# Altium PCB Grabber_DIOT.PCBDOC (part 7 of 7)
Units mm, origin at the board's own origin, x right, y up, seen from the top; angles counter-clockwise.
Board outline 221.14 x 100 mm, 4 copper layers (TopLayer, MidLayer1, Internal layer GND, Bottom Layer), stack 1.607 mm thick; 234 components, 170 nets, 1025 pads, 389 vias.
Unrouted connection lines stored in the file: 2.
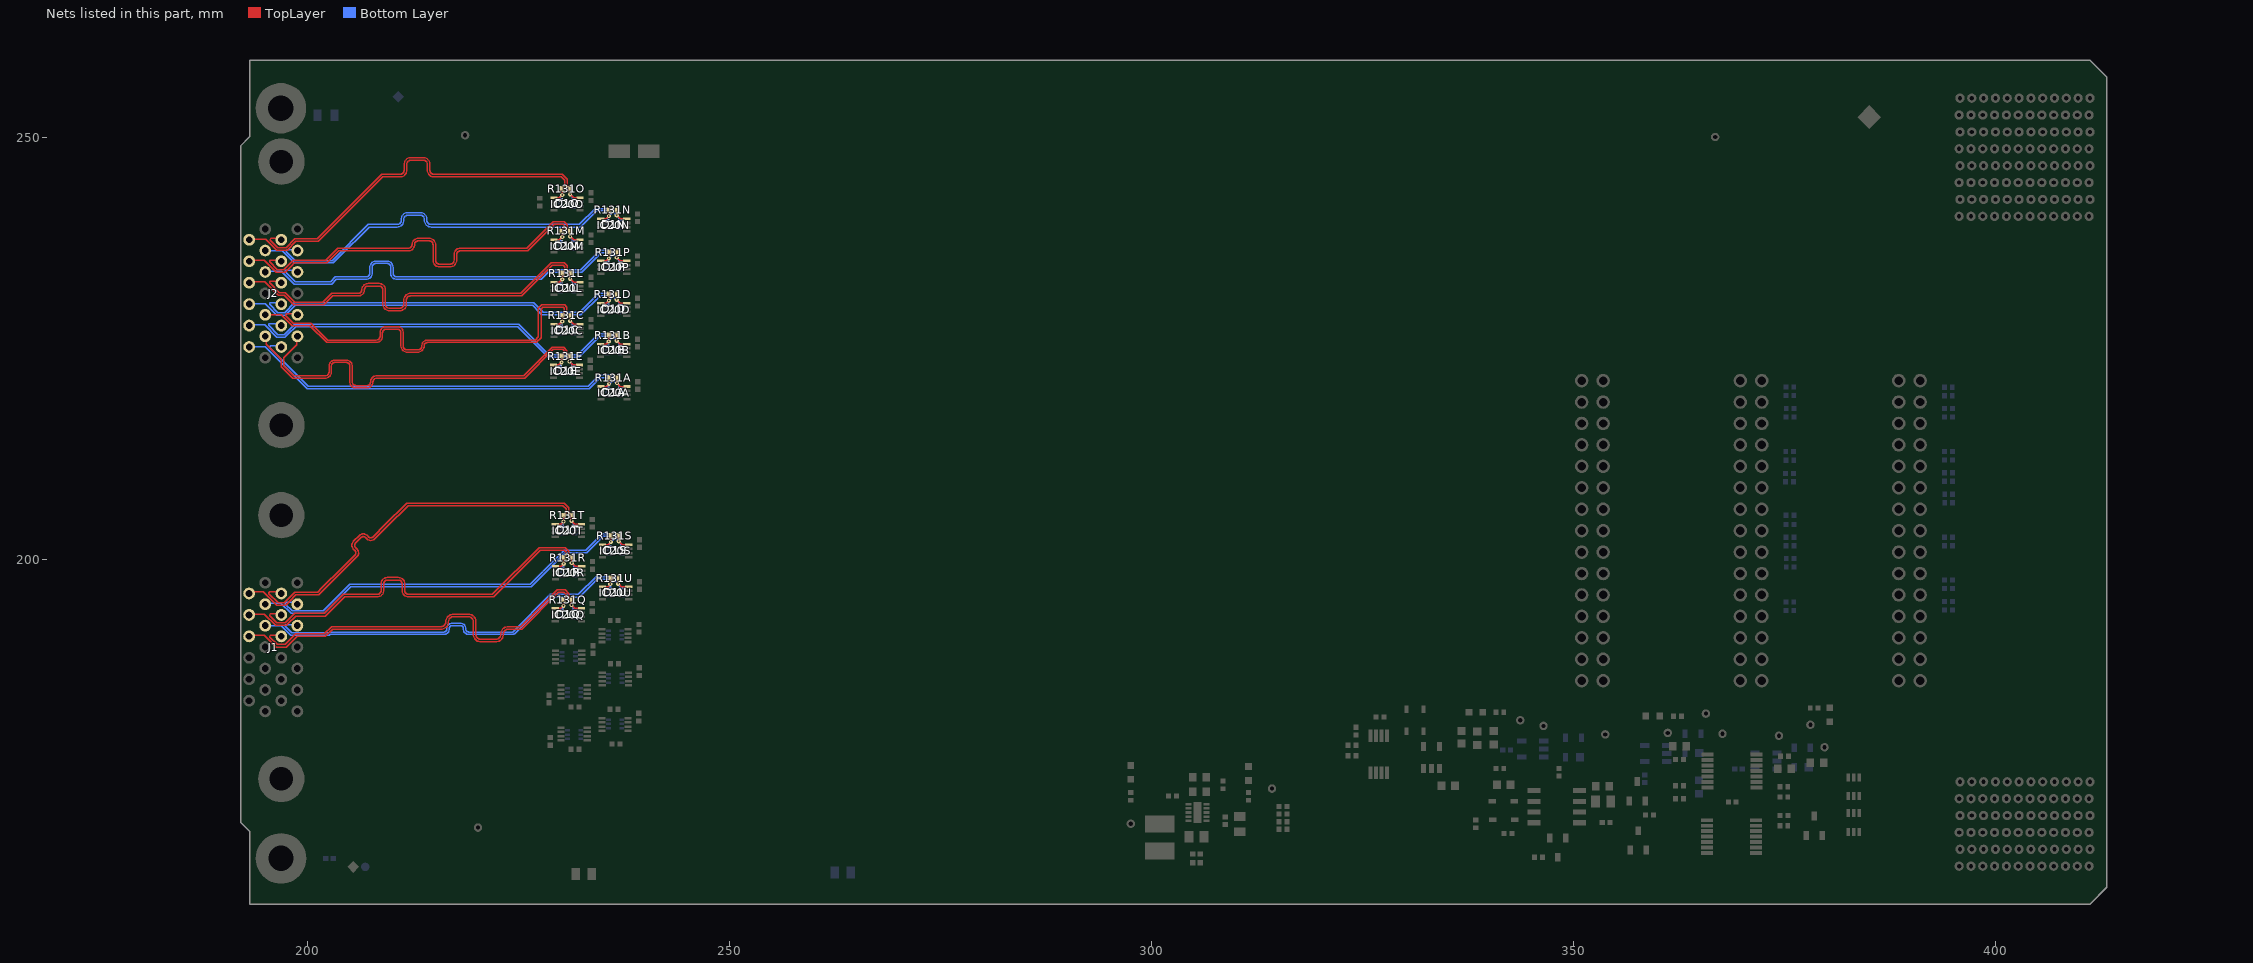
[diagram p8: the nets of this part, all layers, seen from the top]

## Via types
v1: diameter 0.5, hole 0.2, TopLayer to Bottom Layer, tented both sides, 374 vias
v2: diameter 0.8, hole 0.5, TopLayer to Bottom Layer, tented both sides, 15 vias

## Nets (pads, with @x,y where several pads share a name; then routed paths per layer and width w, separated by ;. In a path a pad name is that pad's centre, name@x,y a point inside that pad or via, vN(x,y) a via of type N, cw(c..) or ccw(c..) an arc to the next point about the centre after c; other vN are vias at no path point) (continued)
X0_N: D1T.3 IC20T.1 J1.25 R131T.1 | length 48.3
  TopLayer w0.152: J1.25@193.111,195.969 193.31,196.168 194.789,196.168 195.375,195.582 195.382,195.582 195.899,195.065 195.899,195.058 196.393,194.564 197.424,194.564 197.914,195.054 198.649,195.788 201.339,195.788 201.72,196.169 201.724,196.169 204.548,198.992 205.891,200.336 ccw(c205.438,200.788) 205.936,201.191 205.936,201.196 205.892,201.24 205.694,201.438 cw(c205.931,201.675) 205.694,201.912 206.405,202.623 cw(c206.642,202.386) 206.88,202.623 207.076,202.426 ccw(c207.529,202.879) 207.982,202.426 209.544,203.989 211.887,206.332 211.887,206.35 230.302,206.35 230.669,205.983 230.669,205.539 230.366,205.236 v1(230.366,204.491) 230.041,204.166 IC20T.1@229.391,204.166
  Bottom Layer w0.152: D1T.3@230.151,203.991 230.151,204.276 v1(230.366,204.491)
X0_P: D1T.4 IC20T.8 J1.12 R131T.2 | length 48.2
  TopLayer w0.152: J1.12@196.921,196.106 196.86,196.168 195.554,196.168 195.465,196.079 195.465,195.952 196.555,194.862 197.3,194.862 198.525,196.087 201.216,196.087 201.509,196.38 201.509,196.384 204.332,199.208 205.675,200.551 ccw(c205.438,200.788) 205.675,201.026 205.479,201.222 cw(c205.931,201.675) 205.479,202.127 206.19,202.839 cw(c206.642,202.386) 207.095,202.839 207.292,202.642 ccw(c207.529,202.879) 207.766,202.642 209.329,204.204 211.582,206.458 211.582,206.476 211.761,206.654 230.428,206.654 230.974,206.109 230.974,205.568 231.306,205.236 v1(231.306,204.57) 231.71,204.166 IC20T.8@232.491,204.166
  Bottom Layer w0.152: v1(231.306,204.57) 231.541,204.335 231.541,204.181 D1T.4@231.731,203.991
X1_N: D1S.3 IC20S.1 J1.24 R131S.1 | length 48.7
  TopLayer w0.152: IC20S.1@235.001,201.758 235.651,201.758 v1(235.976,202.083) R131S.1@235.976,202.808
  Bottom Layer w0.152: J1.24@195.016,194.699 195.115,194.798 196.881,194.798 198.076,193.603 202.008,193.603 205.146,196.741 226.527,196.741 226.705,196.919 227.612,197.826 228.127,198.341 230.589,200.803 233.108,200.803 235.071,202.766 236.105,202.766 236.294,202.577 236.294,202.4 v1(235.976,202.083) 235.761,201.868 D1S.3@235.761,201.583
X1_P: D1S.4 IC20S.8 J1.11 R131S.2 | length 48.5
  TopLayer w0.152: R131S.2@236.916,202.808 v1(236.916,202.162) 237.32,201.758 IC20S.8@238.101,201.758
  Bottom Layer w0.152: J1.11@198.826,194.836 198.748,194.914 197.495,194.914 197.406,194.825 197.406,194.699 198.197,193.908 201.882,193.908 205.02,197.046 226.401,197.046 227.485,198.13 227.911,198.556 ; 227.94,198.585 230.463,201.108 232.982,201.108 234.945,203.071 236.231,203.071 236.598,202.703 236.598,202.395 236.831,202.162 v1(236.916,202.162) 237.151,201.927 237.151,201.773 D1S.4@237.341,201.583
X2_N: D1R.3 IC20R.1 J1.23 R131R.1 | length 48.1
  TopLayer w0.152: J1.23@193.111,193.429 193.2,193.518 194.926,193.518 196.248,192.196 197.517,192.196 197.695,192.374 198.619,193.298 202.135,193.298 204.414,195.578 204.574,195.578 208.318,195.578 ccw(c208.318,196.319) 209.059,196.319 209.059,197.125 cw(c209.496,197.125) 209.496,197.562 210.807,197.562 cw(c210.807,197.125) 211.244,197.125 211.244,196.319 ccw(c211.985,196.319) 211.985,195.578 214.703,195.578 222.069,195.578 227.599,201.108 230.461,201.108 230.695,200.873 230.695,200.539 230.401,200.245 v1(230.401,199.5) 230.076,199.175 IC20R.1@229.426,199.175
  Bottom Layer w0.152: D1R.3@230.186,199 230.186,199.285 v1(230.401,199.5)
X2_P: D1R.4 IC20R.8 J1.10 R131R.2 | length 47.9
  TopLayer w0.152: J1.10@196.921,193.566 196.905,193.55 195.629,193.55 195.54,193.461 195.54,193.335 196.374,192.501 197.39,192.501 198.493,193.603 202.008,193.603 204.288,195.882 204.574,195.882 208.318,195.882 ccw(c208.318,196.319) 208.755,196.319 208.755,197.125 cw(c209.496,197.125) 209.496,197.866 210.807,197.866 cw(c210.807,197.125) 211.549,197.125 211.549,196.319 ccw(c211.985,196.319) 211.985,195.882 214.703,195.882 221.943,195.882 227.473,201.412 230.587,201.412 231,200.999 231,200.565 231.107,200.458 231.127,200.458 231.341,200.245 v1(231.341,199.579) 231.745,199.175 IC20R.8@232.526,199.175
  Bottom Layer w0.152: v1(231.341,199.579) 231.576,199.344 231.576,199.19 D1R.4@231.766,199
X3_N: D1Q.3 IC20Q.1 J1.21 R131Q.1 | length 48.2
  TopLayer w0.152: J1.21@193.111,190.889 193.239,191.017 194.916,191.017 196.313,189.621 197.527,189.621 198.791,190.885 202.154,190.885 203,191.731 214.636,191.731 215.838,191.731 ccw(c215.838,192.625) 216.732,192.625 cw(c217.321,192.625) 217.321,193.214 219.089,193.214 cw(c219.089,192.625) 219.679,192.625 219.679,191.131 ccw(c220.573,191.131) 220.573,190.237 222.34,190.237 ccw(c222.34,191.131) 223.235,191.131 223.235,191.142 cw(c223.824,191.142) 223.824,191.731 224.052,191.731 225.395,191.731 229.759,196.095 230.42,196.095 230.667,195.848 230.667,195.562 230.366,195.262 v1(230.366,194.517) 230.041,194.192 IC20Q.1@229.391,194.192
  Bottom Layer w0.152: D1Q.3@230.151,194.017 230.151,194.302 v1(230.366,194.517)
X3_P: D1Q.4 IC20Q.8 J1.8 R131Q.2 | length 47.9
  TopLayer w0.152: J1.8@196.921,190.889 196.793,191.017 195.872,191.017 195.631,191.017 195.542,190.928 195.542,190.802 196.418,189.926 197.401,189.926 198.665,191.19 202.028,191.19 202.874,192.036 214.636,192.036 215.838,192.036 ccw(c215.838,192.625) 216.427,192.625 cw(c217.321,192.625) 217.321,193.519 219.089,193.519 cw(c219.089,192.625) 219.983,192.625 219.983,191.131 ccw(c220.573,191.131) 220.573,190.542 222.34,190.542 ccw(c222.34,191.131) 222.93,191.131 222.93,191.142 cw(c223.824,191.142) 223.824,192.036 224.052,192.036 225.269,192.036 229.633,196.399 230.546,196.399 231.005,195.94 231.005,195.562 231.306,195.262 v1(231.306,194.596) 231.71,194.192 IC20Q.8@232.491,194.192
  Bottom Layer w0.152: v1(231.306,194.596) 231.541,194.361 231.541,194.207 D1Q.4@231.731,194.017
XCLK_N: D1U.3 IC20U.1 J1.22 R131U.1 | length 48.6
  TopLayer w0.152: IC20U.1@235.001,196.792 235.636,196.792 235.885,197.041 235.885,197.751 R131U.1@235.937,197.803
  Bottom Layer w0.152: J1.22@195.018,192.157 196.901,192.157 198.045,191.013 202.612,191.013 202.721,191.123 215.992,191.123 216.208,191.123 ccw(c216.208,191.738) 216.822,191.738 216.822,191.821 cw(c217.158,191.821) 217.158,192.156 218.164,192.156 cw(c218.164,191.821) 218.499,191.821 218.499,191.738 ccw(c219.114,191.738) 219.114,191.123 220.253,191.123 224.477,191.123 224.542,191.189 224.578,191.189 228.934,195.545 232.25,195.545 232.429,195.723 234.358,197.652 236.171,197.652 236.261,197.563 236.261,197.437 235.918,197.094 v1(235.894,197.094) ; D1U.3@235.863,196.617 235.885,196.639 v1@235.885,197.071
XCLK_P: D1U.4 IC20U.8 J1.9 R131U.2 | length 49
  TopLayer w0.152: R131U.2@236.877,197.803 236.825,197.751 236.825,197.101 236.883,197.101 237.192,196.792 IC20U.8@238.101,196.792
  Bottom Layer w0.152: J1.9@198.826,192.159 198.703,192.282 197.477,192.282 197.387,192.193 197.387,192.067 198.161,191.293 199.273,191.293 202.496,191.293 202.606,191.402 215.992,191.402 216.208,191.402 ccw(c216.208,191.738) 216.543,191.738 216.543,191.821 cw(c217.158,191.821) 217.158,192.436 218.164,192.436 cw(c218.164,191.821) 218.778,191.821 218.778,191.738 ccw(c219.114,191.738) 219.114,191.402 220.253,191.402 224.361,191.402 228.808,195.85 232.124,195.85 234.231,197.957 236.298,197.957 236.551,197.703 236.551,197.39 v1(236.834,197.107) ; v1@236.768,197.159 236.892,197.035 236.892,196.931 237.206,196.617 D1U.4@237.341,196.617
Y0_N: D1O.3 IC20O.1 J2.25 R131O.1 | length 48.1
  TopLayer w0.152: J2.25@193.117,237.874 193.188,237.946 195.074,237.946 195.113,237.907 196.384,236.635 197.614,236.635 198.657,237.678 201.321,237.678 208.973,245.33 210.769,245.33 210.998,245.33 ccw(c210.998,246.123) 211.79,246.123 211.79,246.815 cw(c212.278,246.815) 212.278,247.303 213.741,247.303 cw(c213.741,246.815) 214.229,246.815 214.229,246.123 ccw(c215.021,246.123) 215.021,245.33 219.676,245.33 219.688,245.343 221.224,245.343 230.086,245.343 230.499,244.93 230.499,244.23 230.206,243.937 R131O.1@230.206,243.917 v1(230.206,243.192) 229.881,242.867 IC20O.1@229.231,242.867
  Bottom Layer w0.152: D1O.3@229.991,242.692 229.991,242.977 v1(230.206,243.192)
Y0_P: D1O.4 IC20O.8 J2.12 R131O.2 | length 47.9
  TopLayer w0.152: J2.12@196.927,237.874 196.742,238.059 195.696,238.059 195.607,237.97 195.607,237.844 196.51,236.94 197.488,236.94 198.53,237.983 201.194,237.983 208.847,245.635 210.769,245.635 210.998,245.635 ccw(c210.998,246.123) 211.485,246.123 211.485,246.815 cw(c212.278,246.815) 212.278,247.607 213.741,247.607 cw(c213.741,246.815) 214.533,246.815 214.533,246.123 ccw(c215.021,246.123) 215.021,245.635 219.549,245.635 219.562,245.648 221.224,245.648 230.212,245.648 230.804,245.056 230.804,244.279 231.146,243.937 R131O.2@231.146,243.917 v1(231.146,243.271) 231.55,242.867 IC20O.8@232.331,242.867
  Bottom Layer w0.152: v1(231.146,243.271) 231.381,243.036 231.381,242.882 D1O.4@231.571,242.692
Y1_N: D1N.3 IC20N.1 J2.24 R131N.1 | length 49
  TopLayer w0.152: IC20N.1@234.766,240.367 235.416,240.367 v1(235.741,240.692) R131N.1@235.741,241.417
  Bottom Layer w0.152: J2.24@195.022,236.604 197.002,236.604 197.036,236.57 198.476,235.13 203.073,235.13 203.545,235.603 203.581,235.603 203.76,235.782 207.365,239.387 210.416,239.387 210.644,239.387 ccw(c210.644,240.179) 211.437,240.179 211.437,240.301 cw(c211.924,240.301) 211.924,240.788 213.387,240.788 cw(c213.387,240.301) 213.875,240.301 213.875,240.179 ccw(c214.668,240.179) 214.668,239.387 216.756,239.387 232.369,239.387 234.272,241.29 235.952,241.29 236.041,241.2 236.041,240.992 v1(235.741,240.692) 235.526,240.477 D1N.3@235.526,240.192
Y1_P: D1N.4 IC20N.8 J2.11 R131N.2 | length 48.7
  TopLayer w0.152: R131N.2@236.681,241.417 v1(236.681,240.771) 237.085,240.367 IC20N.8@237.866,240.367
  Bottom Layer w0.152: J2.11@198.832,236.604 198.732,236.705 197.602,236.705 197.512,236.615 197.512,236.489 198.592,235.41 202.957,235.41 207.239,239.692 210.416,239.692 210.644,239.692 ccw(c210.644,240.179) 211.132,240.179 211.132,240.301 cw(c211.924,240.301) 211.924,241.093 213.387,241.093 cw(c213.387,240.301) 214.18,240.301 214.18,240.179 ccw(c214.668,240.179) 214.668,239.692 216.756,239.692 232.243,239.692 234.129,241.578 236.109,241.578 236.363,241.324 236.363,241.004 236.596,240.771 v1(236.681,240.771) 236.916,240.536 236.916,240.382 D1N.4@237.106,240.192
Y2_N: D1M.3 IC20M.1 J2.23 R131M.1 | length 48.2
  TopLayer w0.152: J2.23@193.117,235.334 193.248,235.465 194.891,235.465 196.326,234.03 197.367,234.03 198.16,234.824 198.16,234.829 198.47,235.139 202.31,235.139 203.736,236.566 211.049,236.566 211.976,236.566 ccw(c211.976,237.307) 212.717,237.307 cw(c213.154,237.307) 213.154,237.744 214.465,237.744 cw(c214.465,237.307) 214.902,237.307 214.902,235.429 ccw(c215.643,235.429) 215.643,234.687 216.954,234.687 ccw(c216.954,235.429) 217.696,235.429 217.696,236.129 cw(c218.133,236.129) 218.133,236.566 218.361,236.566 226.132,236.566 229.283,239.717 230.305,239.717 230.394,239.627 230.533,239.488 230.533,239.251 230.44,239.157 230.42,239.157 230.206,238.944 R131M.1@230.206,238.924 v1(230.206,238.199) 229.881,237.874 IC20M.1@229.231,237.874
  Bottom Layer w0.152: D1M.3@229.991,237.699 229.991,237.984 v1(230.206,238.199)
Y2_P: D1M.4 IC20M.8 J2.10 R131M.2 | length 48.1
  TopLayer w0.152: J2.10@196.927,235.599 196.757,235.769 196.458,235.471 195.621,235.471 195.532,235.381 195.532,235.255 196.452,234.335 197.24,234.335 197.855,234.95 197.855,234.956 198.344,235.444 202.184,235.444 203.61,236.87 211.049,236.87 211.976,236.87 ccw(c211.976,237.307) 212.413,237.307 cw(c213.154,237.307) 213.154,238.049 214.465,238.049 cw(c214.465,237.307) 215.207,237.307 215.207,235.429 ccw(c215.643,235.429) 215.643,234.992 216.954,234.992 ccw(c216.954,235.429) 217.391,235.429 217.391,236.129 cw(c218.133,236.129) 218.133,236.87 218.361,236.87 226.006,236.87 229.157,240.021 230.395,240.021 230.404,240.012 230.427,240.012 230.689,239.75 230.828,239.61 230.828,239.247 230.918,239.157 230.932,239.157 231.146,238.944 R131M.2@231.146,238.924 ; R131M.2@231.146,238.924 v1(231.146,238.278) 231.55,237.874 IC20M.8@232.331,237.874
  Bottom Layer w0.152: v1(231.146,238.278) 231.381,238.043 231.381,237.889 D1M.4@231.571,237.699
Y3_N: D1L.3 IC20L.1 J2.21 R131L.1 | length 48.3
  TopLayer w0.152: J2.21@193.117,232.794 193.224,232.902 194.964,232.902 196.579,231.287 197.277,231.287 198.409,230.155 201.951,230.155 203.013,231.217 204.665,231.217 206.027,231.217 ccw(c206.027,231.959) 206.769,231.959 cw(c207.206,231.959) 207.206,232.396 208.516,232.396 cw(c208.516,231.959) 208.953,231.959 208.953,230.224 ccw(c209.695,230.224) 209.695,229.482 211.005,229.482 ccw(c211.005,230.224) 211.747,230.224 211.747,230.781 cw(c212.184,230.781) 212.184,231.217 212.413,231.217 225.408,231.217 229.057,234.867 230.345,234.867 230.524,234.688 230.524,234.24 230.434,234.15 230.42,234.15 230.206,233.937 R131L.1@230.206,233.917 v1(230.206,233.192) 229.881,232.867 IC20L.1@229.231,232.867
  Bottom Layer w0.152: D1L.3@229.991,232.692 229.991,232.977 v1(230.206,233.192)
Y3_P: D1L.4 IC20L.8 J2.8 R131L.2 | length 48.2
  TopLayer w0.152: J2.8@196.927,233.059 196.745,233.24 196.485,232.98 195.621,232.98 195.532,232.891 195.532,232.765 196.705,231.592 197.403,231.592 198.535,230.46 201.825,230.46 202.887,231.522 204.665,231.522 206.027,231.522 ccw(c206.027,231.959) 206.464,231.959 cw(c207.206,231.959) 207.206,232.701 208.516,232.701 cw(c208.516,231.959) 209.258,231.959 209.258,230.224 ccw(c209.695,230.224) 209.695,229.787 211.005,229.787 ccw(c211.005,230.224) 211.442,230.224 211.442,230.781 cw(c212.184,230.781) 212.184,231.522 212.413,231.522 225.282,231.522 228.931,235.171 230.471,235.171 230.828,234.814 230.828,234.24 230.918,234.15 230.932,234.15 231.146,233.937 R131L.2@231.146,233.917 v1(231.146,233.271) 231.55,232.867 IC20L.8@232.331,232.867
  Bottom Layer w0.152: v1(231.146,233.271) 231.381,233.036 231.381,232.882 D1L.4@231.571,232.692
YCLK_N: D1P.3 IC20P.1 J2.22 R131P.1 | length 49.2
  TopLayer w0.152: IC20P.1@234.766,235.367 235.416,235.367 v1(235.741,235.692) R131P.1@235.741,236.417
  Bottom Layer w0.152: J2.22@195.022,234.064 195.125,234.167 196.896,234.167 198.438,232.625 202.884,232.625 203.456,233.197 206.769,233.197 206.985,233.197 ccw(c206.985,233.914) 207.701,233.914 207.701,234.64 cw(c208.138,234.64) 208.138,235.077 209.448,235.077 cw(c209.448,234.64) 209.885,234.64 209.885,233.914 ccw(c210.602,233.914) 210.602,233.197 213.154,233.197 227.752,233.197 228.582,234.027 232.52,234.027 234.843,236.35 235.929,236.35 236.059,236.22 236.059,236.009 v1(235.741,235.692) 235.526,235.477 D1P.3@235.526,235.192
YCLK_P: D1P.4 IC20P.8 J2.9 R131P.2 | length 50.7
  TopLayer w0.152: R131P.2@236.681,236.417 v1(236.681,235.771) 237.085,235.367 IC20P.8@237.866,235.367
  Bottom Layer w0.152: J2.9@198.602,234.064 198.75,234.064 J2.9@198.832,234.064 ; J2.9@198.602,234.133 198.602,234.333 198.602,234.558 J2.9@198.832,234.329 ; J2.9@198.832,233.477 J2.9@198.832,234.064 ; D1P.4@237.106,235.192 236.916,235.382 236.916,235.536 v1(236.681,235.771) 236.352,236.1 236.352,236.342 236.039,236.654 234.716,236.654 232.394,234.332 228.491,234.332 227.636,233.477 213.154,233.477 210.602,233.477 cw(c210.602,233.914) 210.165,233.914 210.165,234.64 ccw(c209.448,234.64) 209.448,235.356 208.138,235.356 ccw(c208.138,234.64) 207.421,234.64 207.421,233.914 cw(c206.985,233.914) 206.985,233.477 206.769,233.477 203.341,233.477 202.768,232.904 198.554,232.904 197.383,234.075 197.383,234.201 197.472,234.29 198.521,234.29 198.563,234.333 198.791,234.105 J2.9@198.832,234.064
Z0_N: D1D.3 IC20D.1 J2.19 R131D.1 | length 48.4
  TopLayer w0.152: IC20D.1@234.766,230.367 235.416,230.367 v1(235.741,230.692) R131D.1@235.741,231.417
  Bottom Layer w0.152: J2.19@193.117,230.254 193.183,230.321 195.011,230.321 196.381,228.951 197.432,228.951 197.521,229.04 197.806,229.325 198.582,230.101 226.71,230.101 227.504,229.306 227.75,229.06 227.84,228.971 232.414,228.971 234.687,231.244 235.865,231.244 236.042,231.067 236.042,230.941 235.793,230.692 v1(235.741,230.692) 235.526,230.477 D1D.3@235.526,230.192
Z0_P: D1D.4 IC20D.8 J2.6 R131D.2 | length 48.2
  TopLayer w0.152: R131D.2@236.681,231.417 v1(236.681,230.771) 237.085,230.367 IC20D.8@237.866,230.367
  Bottom Layer w0.152: J2.6@196.927,230.254 196.74,230.441 195.627,230.441 195.537,230.352 195.537,230.226 196.507,229.256 197.305,229.256 198.456,230.406 226.836,230.406 227.72,229.522 227.966,229.276 232.288,229.276 234.561,231.549 235.992,231.549 236.347,231.193 236.347,231.029 236.605,230.771 v1(236.681,230.771) 236.916,230.536 236.916,230.382 D1D.4@237.106,230.192
Z1_N: D1C.3 IC20C.1 J2.18 R131C.1 | length 47.9
  TopLayer w0.152: J2.18@195.032,228.974 195.042,228.984 196.939,228.984 198.205,227.719 200.297,227.719 202.294,225.722 207.982,225.722 208.198,225.722 ccw(c208.198,226.438) 208.914,226.438 208.914,226.866 cw(c209.351,226.866) 209.351,227.303 210.661,227.303 cw(c210.661,226.866) 211.098,226.866 211.098,225.285 ccw(c211.814,225.285) 211.814,224.569 213.125,224.569 ccw(c213.125,225.285) 213.841,225.285 cw(c214.278,225.285) 214.278,225.722 215.437,225.722 227.128,225.722 227.702,226.296 227.702,229.663 227.905,229.867 230.359,229.867 230.459,229.766 230.459,229.19 230.206,228.937 v1(230.206,228.192) 229.881,227.867 IC20C.1@229.231,227.867
  Bottom Layer w0.152: D1C.3@229.991,227.692 229.991,227.977 v1(230.206,228.192)
Z1_P: D1C.4 IC20C.8 J2.5 R131C.2 | length 48
  TopLayer w0.152: J2.5@198.832,229.249 198.64,229.441 198.304,229.104 197.52,229.104 197.43,229.015 197.43,228.889 198.321,227.998 200.413,227.998 202.41,226.002 207.982,226.002 208.198,226.002 ccw(c208.198,226.438) 208.634,226.438 208.634,226.866 cw(c209.351,226.866) 209.351,227.582 210.661,227.582 cw(c210.661,226.866) 211.378,226.866 211.378,225.285 ccw(c211.814,225.285) 211.814,224.848 213.125,224.848 ccw(c213.125,225.285) 213.562,225.285 cw(c214.278,225.285) 214.278,226.002 215.437,226.002 227.012,226.002 227.397,226.386 227.397,229.79 227.779,230.171 230.485,230.171 230.764,229.892 230.764,229.318 231.146,228.937 v1(231.146,228.271) 231.55,227.867 IC20C.8@232.331,227.867
  Bottom Layer w0.152: v1(231.146,228.271) 231.381,228.036 231.381,227.882 D1C.4@231.571,227.692
Z2_N: D1B.3 IC20B.1 J2.17 R131B.1 | length 49.7
  TopLayer w0.152: IC20B.1@234.756,225.517 235.406,225.517 v1(235.731,225.842) R131B.1@235.731,226.567
  Bottom Layer w0.152: J2.17@193.117,227.714 193.199,227.797 194.955,227.797 196.405,226.347 197.385,226.347 197.467,226.429 197.77,226.732 198.63,227.591 224.915,227.591 228.527,223.979 232.173,223.979 232.336,224.143 234.649,226.455 235.875,226.455 236.046,226.283 236.046,226.157 v1(235.731,225.842) 235.516,225.627 D1B.3@235.516,225.342
Z2_P: D1B.4 IC20B.8 J2.4 R131B.2 | length 49.7
  TopLayer w0.152: R131B.2@236.671,226.567 v1(236.671,225.921) 237.075,225.517 IC20B.8@237.856,225.517
  Bottom Layer w0.152: J2.4@196.927,227.714 196.702,227.939 195.512,227.939 195.423,227.85 195.423,227.724 196.521,226.626 197.269,226.626 198.514,227.871 225.031,227.871 228.643,224.259 232.057,224.259 234.533,226.735 235.99,226.735 236.326,226.399 236.326,226.247 236.652,225.921 v1(236.671,225.921) 236.906,225.686 236.906,225.532 D1B.4@237.096,225.342
Z3_N: D1A.3 IC20A.1 J2.15 R131A.1 | length 48.7
  TopLayer w0.152: IC20A.1@234.791,220.493 235.441,220.493 v1(235.766,220.818) R131A.1@235.766,221.543
  Bottom Layer w0.152: J2.15@193.117,225.174 195.049,225.174 199.809,220.414 199.988,220.236 233.42,220.236 233.509,220.325 234.727,221.543 235.908,221.543 236.067,221.383 236.067,221.067 235.818,220.818 v1(235.766,220.818) 235.551,220.603 D1A.3@235.551,220.318
Z3_P: D1A.4 IC20A.8 J2.2 R131A.2 | length 48.7
  TopLayer w0.152: R131A.2@236.706,221.543 v1(236.706,220.897) 237.11,220.493 IC20A.8@237.891,220.493
  Bottom Layer w0.152: J2.2@196.927,225.439 196.752,225.614 196.435,225.297 195.662,225.297 195.573,225.208 195.573,225.081 200.114,220.541 233.294,220.541 234.6,221.847 236.034,221.847 236.372,221.509 236.372,221.113 236.461,221.024 236.485,221.024 236.612,220.897 v1(236.706,220.897) 236.941,220.662 236.941,220.508 D1A.4@237.131,220.318
ZCLK_N: D1E.3 IC20E.1 J2.16 R131E.1 | length 47.7
  TopLayer w0.152: J2.16@195.157,226.573 195.157,225.505 196.918,223.744 196.918,222.831 198.266,221.482 201.926,221.482 202.142,221.482 ccw(c202.142,222.199) 202.858,222.199 202.858,222.91 cw(c203.295,222.91) 203.295,223.346 204.605,223.346 cw(c204.605,222.91) 205.042,222.91 205.042,221.045 ccw(c205.759,221.045) 205.759,220.329 207.069,220.329 ccw(c207.069,221.045) 207.786,221.045 cw(c208.222,221.045) 208.222,221.482 209.343,221.482 225.748,221.482 225.81,221.544 229.145,224.879 230.247,224.879 230.459,224.667 230.459,224.409 R131E.1@230.141,224.092 v1(230.141,223.367) 229.816,223.042 IC20E.1@229.166,223.042
  Bottom Layer w0.152: D1E.3@229.926,222.867 229.926,223.152 v1(230.141,223.367)
ZCLK_P: D1E.4 IC20E.8 J2.3 R131E.2 | length 48
  TopLayer w0.152: J2.3@198.738,226.615 198.738,225.441 197.197,223.9 197.197,222.946 198.382,221.762 201.926,221.762 202.142,221.762 ccw(c202.142,222.199) 202.579,222.199 202.579,222.91 cw(c203.295,222.91) 203.295,223.626 204.605,223.626 cw(c204.605,222.91) 205.322,222.91 205.322,221.045 ccw(c205.759,221.045) 205.759,220.608 207.069,220.608 ccw(c207.069,221.045) 207.506,221.045 cw(c208.222,221.045) 208.222,221.762 209.343,221.762 225.633,221.762 225.695,221.824 229.03,225.159 230.362,225.159 230.763,224.758 230.763,224.409 R131E.2@231.081,224.092 v1(231.081,223.446) 231.485,223.042 IC20E.8@232.266,223.042
  Bottom Layer w0.152: v1(231.081,223.446) 231.316,223.211 231.316,223.057 D1E.4@231.506,222.867
pads on no net: D7.5 D8.4 D8.5 FTG21.FTG2 FTG22.1 FTG23.1 FTG24.1 IC1.5 IC6.4 IC24.5 IC26.5 IC27.4 J2.7 J2.20 J3.17 J3.18 J3.20 J3.21 J3.23 J3.24 J4.A5 J4.B1 J4.B5 J4.D5 J4.E4 J4.E5 J4.F4 J4.G3 J4.H3 J4.I2 J4.J3 J4.K3 J4.L2 J4.L3 J5.A3 J5.A5 J5.A6 J5.A7 J5.A8 J5.B2 J5.B3 J5.B4 J5.B5 J5.B6 J5.B7 J5.B8 J5.C2 J5.C4 J5.C6 J5.C8 J5.D3 J5.D5 J5.D6 J5.D7 J5.D8 J5.E2 J5.E3 J5.E4 J5.E5 J5.E6 J5.E7 J5.E8 J5.F2 J5.F4 J5.F6 J5.F8 J5.G3 J5.G5 J5.G6 J5.G7 J5.H2 J5.H3 J5.H4 J5.H5 J5.H6 J5.H7 J5.H8 J5.I2 J5.I4 J5.I6 J5.I8 J5.J3 J5.J5 J5.J7 J5.K2 J5.K3 J5.K4 J5.K5 J5.K6 J5.K7 J5.K8 J5.L2 J5.L4 J5.L6 J5.L8

## Polygon pours and split planes (outlines as drawn)
no net on TopLayer "copper_balance_top" (solid, pour order 21): 194.098,257.003 411.838,257.003 411.838,211.987 411.835,203.237 411.838,203.237 411.838,161.005 192.939,161.005 192.939,166.3 191.428,167.81 191.428,247.791 192.409,248.772 192.409,255.313
GND on TopLayer "GND_L01_P020" (solid, remove dead copper, pour order 20): 399.23,210.884 399.23,207.33 412.965,207.33 412.965,210.884
STRIP2 on TopLayer "esd1" (solid, pour order 16): 276.694,160.156 293.76,160.156 293.76,161.426 238.76,161.426 238.76,160.156
STRIP3 on TopLayer "STRIP3_L01_P015" (solid, pour order 15): 411.294,160.156 411.31,160.156 412.55,161.396 313.76,161.396 313.76,160.156
STRIP1 on TopLayer "esd1" (solid, pour order 14): 194.01,166.231 201.135,166.231 201.135,161.706 233.76,161.706 233.76,160.031 194.01,160.031
no net on Bottom Layer "copper_balance_bot" (solid, pour order 22): 194.21,256.964 412.912,256.964 412.912,212.912 412.909,204.162 412.912,204.162 412.912,161.93 194.013,161.93 194.013,167.225 192.503,168.735 192.503,248.716 193.484,249.696 193.484,256.238
STRIP2 on Bottom Layer "esd1" (solid, pour order 19): 276.694,160.156 293.76,160.156 293.76,161.426 238.76,161.426 238.76,160.156
STRIP3 on Bottom Layer "STRIP3_L04_P018" (solid, pour order 18): 411.294,160.156 411.31,160.156 412.55,161.396 313.76,161.396 313.76,160.156
STRIP1 on Bottom Layer "esd1" (solid, pour order 17): 193.963,165.471 201.088,165.471 201.088,161.531 233.713,161.531 233.713,160.031 193.963,160.031
GND on MidLayer1 (split plane): 412.721,256.945 412.721,165.237 388.245,165.237 334.774,165.237 334.249,165.762 334.249,170.903 335.318,171.971 335.348,172.011 335.368,172.058 335.374,172.107 335.374,174.695 335.368,174.745 335.348,174.791 335.318,174.831 335.278,174.861 335.232,174.88 335.182,174.887 330.82,174.887 330.77,174.88 330.723,174.861 330.684,174.831 327.627,171.774 315.632,171.774 315.582,171.768 315.536,171.749 315.496,171.718 315.466,171.678 315.446,171.632 315.44,171.582 315.44,162.199 306.374,162.199 306.374,170.057 306.374,174.632 306.368,174.682 306.348,174.728 306.318,174.768 305.993,175.093 305.953,175.124 305.934,175.132 305.907,175.143 305.857,175.149 301.507,175.149 301.457,175.143 301.411,175.124 301.371,175.093 300.146,173.868 300.116,173.828 300.096,173.782 300.09,173.732 300.09,170.249 244.982,170.249 239.481,175.75 239.481,251.339 239.475,251.389 239.456,251.435 239.425,251.475 239.058,251.842 239.018,251.873 238.999,251.881 238.972,251.892 238.922,251.899 232.722,251.899 232.678,251.893 232.672,251.892 232.626,251.873 232.586,251.842 227.261,246.518 227.231,246.478 227.211,246.431 227.205,246.382 227.205,173.936 227.211,173.887 227.223,173.859 227.231,173.84 227.261,173.8 238.74,162.321 239.19,161.871 239.23,161.841 239.276,161.822 239.326,161.815 306.057,161.815 306.107,161.822 306.12,161.827 306.132,161.822 306.182,161.815 306.232,161.822 306.27,161.837 306.307,161.822 306.357,161.815 412.721,161.815 412.721,161.368 411.02,159.667 193.703,159.667 193.703,167.756 193.702,167.766 193.693,167.856 193.673,167.923 193.664,167.952 193.617,168.04 193.567,168.1 193.553,168.117 192.603,169.068 192.603,248.795 193.553,249.746 193.617,249.823 193.664,249.911 193.693,250.007 193.703,250.107 193.703,258.646 411.02,258.646
P12V0_CPCIS on MidLayer1 (split plane): 334.99,172.187 333.921,171.118 333.891,171.078 333.871,171.032 333.865,170.982 333.865,165.682 333.871,165.633 333.891,165.586 333.921,165.546 334.559,164.909 334.598,164.878 334.645,164.859 334.695,164.853 388.245,164.853 412.721,164.853 412.721,162.199 315.824,162.199 315.824,171.39 327.707,171.39 327.757,171.397 327.803,171.416 327.843,171.446 330.899,174.503 334.99,174.503
P3V3 on MidLayer1 (split plane): 239.097,251.26 239.097,175.67 239.104,175.621 239.123,175.574 239.153,175.535 244.767,169.921 244.806,169.891 244.853,169.872 244.903,169.865 300.282,169.865 300.332,169.872 300.378,169.891 300.418,169.921 300.448,169.961 300.468,170.008 300.474,170.057 300.474,173.653 301.587,174.765 305.777,174.765 305.99,174.553 305.99,170.057 305.99,162.199 239.406,162.199 239.012,162.593 227.589,174.016 227.589,246.302 232.801,251.514 238.843,251.514
GND on Internal layer GND (split plane): 412.721,256.945 412.721,161.368 411.02,159.667 315.16,159.667 315.16,161.732 315.151,161.78 315.123,161.822 315.082,161.849 315.033,161.859 237.018,161.859 235.296,163.581 235.255,163.609 235.206,163.619 233.033,163.619 232.984,163.609 232.943,163.581 232.915,163.54 232.906,163.491 232.906,159.667 193.703,159.667 193.703,167.756 193.702,167.766 193.693,167.856 193.673,167.923 193.664,167.952 193.617,168.04 193.567,168.1 193.553,168.117 192.603,169.068 192.603,248.795 193.553,249.746 193.617,249.823 193.664,249.911 193.693,250.007 193.703,250.107 193.703,258.646 411.02,258.646
STRIP3 on Internal layer GND (split plane): 236.875,161.641 236.917,161.614 236.966,161.604 314.906,161.604 314.906,159.667 233.16,159.667 233.16,163.364 235.153,163.364

## Keep-outs
KeepOutLayer:
  lines w0.076: 257.626,196.027 257.626,196.741 ; 317.499,227.5 317.499,228.895 ; 334.499,226.569 334.499,227.895

## Other copper
TopLayer:
  rectangle net GND: 399.413,207.379 412.9,210.859
  region net GND: 305.382,170.865 304.09,170.865 304.09,172.999 305.382,172.999
  region net GND: 306.89,169.165 305.757,169.165 305.757,164.805 306.131,164.805 309.407,164.804 311.182,166.579 311.182,168.275 309.889,168.275 309.302,168.863 306.89,168.863
  region net NetIC27_9: 299.23,167.656 302.73,167.656 302.73,168.924 303.171,169.365 304.79,169.365 304.79,169.656 304.081,169.656 299.23,169.656
  region net P3V3: 305.007,167.833 304.127,167.833 302.749,166.455 296.307,166.455 296.307,164.363 302.749,164.371 302.749,164.808 305.007,164.808
  region net P12V0: 313.227,168.725 313.203,168.777 313.116,168.918 312.92,169 309.808,169 309.601,169.208 307.331,169.208 307.31,169.218 307.301,169.238 307.301,169.29 307.28,169.323 307.168,169.365 306.887,169.365 306.887,169.424 306.887,169.619 306.887,169.664 307.106,169.666 307.249,169.709 307.29,169.747 307.301,169.769 307.301,169.801 307.313,169.822 307.349,169.832 308.176,169.832 308.283,169.864 308.334,169.915 308.897,170.479 313.161,170.479 313.303,170.542 313.371,170.642 313.688,171.108 315.464,171.108 315.464,167.629 315.442,167.608 313.68,167.608
  region net P12V0_CPCIS: 318.34,167.632 315.832,167.632 315.832,171.132 318.362,171.132
  region net P12V0_CPCIS: 334.587,172.157 334.587,174.432 331.894,174.432 331.894,172.157
  region net GND: 341.082,178.532 341.057,178.507 337.794,178.483 337.764,178.407 337.693,178.357 335.632,178.373 335.632,177.057 335.282,177.057 334.757,176.532 333.232,176.532 332.939,176.239 332.939,175.255 333.53,175.255 333.532,175.257 333.532,175.982 335.532,175.982 335.836,175.803 335.957,175.655 335.957,174.582 335.532,174.157 335.532,172.732 338.023,172.73 338.154,172.832 338.257,172.964 338.257,174.657 341.082,177.482 341.082,177.557
Bottom Layer:
  region net GND: 412.9,210.859 399.413,210.859 399.413,207.379 412.9,207.379
Internal layer GND (plane layer: these items are gaps in the copper):
  lines w0.25: 233.033,159.164 233.033,163.491 235.206,163.491 236.966,161.732 315.033,161.732 315.033,159.164
MidLayer1 (plane layer: these items are gaps in the copper):
  lines w0.381: 238.876,162.457 239.326,162.007 ; 306.057,162.007 239.326,162.007 ; 306.182,162.007 306.182,170.057 306.182,174.632 305.857,174.957 301.507,174.957 300.282,173.732 300.282,170.057 244.903,170.057 239.289,175.67 239.289,251.339 238.922,251.706 233.947,251.706 232.722,251.706 227.397,246.382 227.397,173.936 239.326,162.007 ; 306.357,162.007 315.632,162.007 315.632,171.582 322.119,171.582 327.707,171.582 330.82,174.695 335.182,174.695 335.182,172.107 334.057,170.982 334.057,165.682 334.695,165.045 388.245,165.045 413.282,165.045 ; 315.232,162.007 413.057,162.007

## Silkscreen, mask and mechanical layers (free items; w line width, h text height)
TopOverlay:
  drawing of 1271 lines, arcs and shapes, not listed
  text "Grabber_DIOT  v1.1.3" at 281.441,253.243 h1.52
  text "GND" at 217.391,251.934 h1
  text "WUT ISE 2024" at 290.545,250.119 h1.02
  text "GND" at 362.859,249.519 h1
  text "P6" at 385.318,244.562 h1.52
  text "Y0" at 224.915,241.556 h0.89
  text "Y1" at 240.024,241.417 h0.89
  text "Y2" at 225.031,236.566 h0.89
  text "YCLK" at 240.144,235.993 h0.89
  text "Y3" at 225.282,231.867 h0.89
  text "Z0" at 240.024,230.858 h0.89
  text "EEM0" at 388.173,227.526 h1.52
  text "EEM2" at 350.456,227.22 h1.52
  text "EEM1" at 369.868,227.22 h1.52
  text "Z1" at 225.408,226.559 h0.89
  text "Z2" at 240.024,226.35 h0.89
  text "ZCLK" at 223.907,221.482 h0.89
  text "Z3" at 240.129,221.378 h0.89
  text "X0" at 208.036,205.667 h0.89
  text "X1" at 213.405,203.312 h0.89
  text "X2" at 207.77,200.811 h0.89
  text "XCK" at 213.098,198.378 h0.89
  text "LVDS CH0...7 EEM-0" at 384.794,196.062 h1.02 r90
  text "X3" at 207.437,195.721 h0.89
  text "LVDS CH8...15 EEM-1" at 366.102,195.615 h1.02 r90
  text "LVDS CH16...23 EEM-2" at 347.237,195.272 h1.02 r90
  text "SERTX" at 212.798,193.311 h0.89
  text "SERRX" at 207.281,190.844 h0.89
  text "CC0" at 212.658,188.342 h0.89
  text "CC1" at 208.445,185.938 h0.89
  text "CC2" at 212.979,182.867 h0.89
  text "SDA1" at 366.109,182.813 h0.76 r90
  text "3V3  / MP2" at 337.401,182.768 h0.76
  text "3V3  / MP1" at 358.25,182.247 h0.76
  text "MP2" at 342.811,182.196 h0.76
  text "SCL2" at 346.916,181.38 h0.76 r90
  text "CC3" at 208.114,180.761 h0.89
  text "3V3  / MP0" at 381.269,180.436 h0.76
  text "SCL1" at 357.526,179.142 h0.76
  text "MP1" at 364.878,178.995 h0.76
  text "SCL0" at 370.507,178.758 h0.76
  text "MP0" at 376.429,178.6 h0.76
  text "SDA2" at 352.434,177.505 h0.76
  text "SDA0" at 380.916,177.398 h0.76
  text "P1" at 392.006,176.53 h1.52
  text "3.3V" at 292.616,174.205 h1
  text "12V" at 312.821,174.171 h1
  text "3.3V" at 292.616,168.141 h1
  text "GND" at 221.501,167.778 h1
Bottom Overlay:
  drawing of 1251 lines, arcs and shapes, not listed
  text "Grabber_DIOT v1.1.3" at 317.548,253.063 h1.52
  text "GND" at 220.03,251.934 h1
  text "WUT ISE 2024" at 308.831,250.119 h1.02
  text "GND" at 370.807,249.519 h1
  text "SDA1" at 365.334,182.813 h0.76 r270
  text "MP2" at 344.702,182.215 h0.76
  text "MP0" at 379.167,181.443 h0.76
  text "SCL2" at 346.074,181.357 h0.76 r270
  text "MP1" at 369.597,180.413 h0.76
  text "SCL0" at 375.428,180.223 h0.76
  text "SCL1" at 360.04,179.135 h0.76
  text "SDA2" at 355.185,177.511 h0.76
  text "SDA0" at 383.591,177.383 h0.76
  text "12V" at 315.797,174.171 h1
  text "3.3V" at 302.561,168.162 h1
  text "GND" at 218.972,167.778 h1
TopSolder:
  rectangle: 193.889,159.661 413.237,161.325
  rectangle: 399.413,207.155 413.007,211.033
Bottom Solder:
  rectangle: 193.889,159.666 413.228,161.325
  rectangle: 399.413,207.155 413.007,211.033
Mechanical1:
  drawing of 306 lines, arcs and shapes, not listed
  text "Layer" at 259.883,304.571 h1.52
  text "Name" at 270.295,304.571 h1.52
  text "Material" at 299.75,304.571 h1.52
  text "Thickness" at 321.588,304.571 h1.52
  text "Constant" at 338.094,304.571 h1.52
  text "Board Layer Stack" at 352.569,304.571 h1.52
  text "TopOverlay" at 270.295,301.523 h1.52
  text "TopSolder" at 270.295,298.475 h1.52
  text "Solder Resist" at 299.75,298.475 h1.52
  text "0,053mm" at 321.588,298.475 h1.52
  text "3.5" at 338.094,298.475 h1.52
  text "1" at 259.883,295.427 h1.52
  text "TopLayer" at 270.295,295.427 h1.52
  text "0,035mm" at 321.588,295.427 h1.52
  text "Dielectric1" at 270.295,292.379 h1.52
  text "FR-4" at 299.75,292.379 h1.52
  text "0,377mm" at 321.588,292.379 h1.52
  text "4.5" at 338.094,292.379 h1.52
  text "2" at 259.883,289.331 h1.52
  text "MidLayer1" at 270.295,289.331 h1.52
  text "0,035mm" at 321.588,289.331 h1.52
  text "Dielectric 2" at 270.295,286.283 h1.52
  text "FR-4" at 299.75,286.283 h1.52
  text "0,713mm" at 321.588,286.283 h1.52
  text "4.5" at 338.094,286.283 h1.52
  text "3" at 259.883,283.235 h1.52
  text "Internal layer GND" at 270.295,283.235 h1.52
  text "0,035mm" at 321.588,283.235 h1.52
  text "Dielectric 3" at 270.295,280.187 h1.52
  text "FR-4" at 299.75,280.187 h1.52
  text "0,377mm" at 321.588,280.187 h1.52
  text "4.5" at 338.094,280.187 h1.52
  text "4" at 259.883,277.139 h1.52
  text "Bottom Layer" at 270.295,277.139 h1.52
  text "0,035mm" at 321.588,277.139 h1.52
  text "Bottom Solder" at 270.295,274.091 h1.52
  text "Solder Resist" at 299.75,274.091 h1.52
  text "0,053mm" at 321.588,274.091 h1.52
  text "3.5" at 338.094,274.091 h1.52
  text "Bottom Overlay" at 270.295,271.043 h1.52
Mechanical13:
  lines w0.1: 190.648,159.118 190.648,260.1

## Text inside footprints (layer, text, board x,y; h text height)
J1: TopOverlay "25" at 193.6,197.109 h1.02 r90; TopOverlay "12" at 197.41,197.234 h1.02 r90; TopOverlay "13" at 199.315,198.514 h1.02 r90; TopOverlay "26" at 195.505,198.389 h1.02 r90; TopOverlay "14" at 195.5,179.479 h1.02 r90; TopOverlay "15" at 193.595,180.599 h1.02 r90; TopOverlay "2" at 197.405,181.299 h1.02 r90; TopOverlay "1" at 199.31,180.429 h1.02 r90; Mechanical14 "25" at 193.6,197.109 h1.02 r90; Mechanical14 "12" at 197.41,197.234 h1.02 r90; Mechanical14 "13" at 199.315,198.514 h1.02 r90; Mechanical14 "26" at 195.505,198.389 h1.02 r90; Mechanical14 "14" at 195.5,179.479 h1.02 r90; Mechanical14 "15" at 193.595,180.599 h1.02 r90; Mechanical14 "2" at 197.405,181.299 h1.02 r90; Mechanical14 "1" at 199.31,180.429 h1.02 r90
J2: TopOverlay "25" at 193.606,239.014 h1.02 r90; TopOverlay "12" at 197.416,239.139 h1.02 r90; TopOverlay "13" at 199.321,240.419 h1.02 r90; TopOverlay "26" at 195.511,240.294 h1.02 r90; TopOverlay "14" at 195.506,221.384 h1.02 r90; TopOverlay "15" at 193.601,222.504 h1.02 r90; TopOverlay "2" at 197.411,223.204 h1.02 r90; TopOverlay "1" at 199.316,222.334 h1.02 r90; Mechanical14 "25" at 193.606,239.014 h1.02 r90; Mechanical14 "12" at 197.416,239.139 h1.02 r90; Mechanical14 "13" at 199.321,240.419 h1.02 r90; Mechanical14 "26" at 195.511,240.294 h1.02 r90; Mechanical14 "14" at 195.506,221.384 h1.02 r90; Mechanical14 "15" at 193.601,222.504 h1.02 r90; Mechanical14 "2" at 197.411,223.204 h1.02 r90; Mechanical14 "1" at 199.316,222.334 h1.02 r90
J3: TopOverlay "30" at 354.947,186.267 h1.02 r270; Mechanical14 "30" at 354.947,186.267 h1.02 r270
J4: TopOverlay "6" at 391.182,173.307 h1 r90; TopOverlay "5" at 391.182,171.307 h1 r90; TopOverlay "4" at 391.182,169.307 h1 r90; TopOverlay "3" at 391.182,167.307 h1 r90; TopOverlay "2" at 391.182,165.307 h1 r90; TopOverlay "1" at 391.182,163.307 h1 r90; TopOverlay "L" at 396.232,161.457 h1 r90; TopOverlay "K" at 397.632,161.457 h1 r90; TopOverlay "J" at 399.032,161.457 h1 r90; TopOverlay "I" at 400.432,161.707 h1 r90; TopOverlay "H" at 401.832,161.457 h1 r90; TopOverlay "G" at 403.232,161.457 h1 r90; TopOverlay "F" at 404.632,161.457 h1 r90; TopOverlay "E" at 406.032,161.457 h1 r90; TopOverlay "D" at 407.432,161.457 h1 r90; TopOverlay "C" at 408.832,160.457 h1 r90; TopOverlay "B" at 410.232,160.457 h1 r90; TopOverlay "A" at 411.632,160.457 h1 r90; DrillDrawing "Diam. 0.5mm +/-0.05" at 394.932,157.376 h1; DrillDrawing "PRESS-FIT TECHNOLOGY" at 394.515,155.9 h1; Mechanical14 "6" at 391.182,173.307 h1 r90; Mechanical14 "5" at 391.182,171.307 h1 r90; Mechanical14 "4" at 391.182,169.307 h1 r90; Mechanical14 "3" at 391.182,167.307 h1 r90; Mechanical14 "2" at 391.182,165.307 h1 r90; Mechanical14 "1" at 391.182,163.307 h1 r90; Mechanical14 "L" at 396.232,161.457 h1 r90; Mechanical14 "K" at 397.632,161.457 h1 r90; Mechanical14 "J" at 399.032,161.457 h1 r90; Mechanical14 "I" at 400.432,161.707 h1 r90; Mechanical14 "H" at 401.832,161.457 h1 r90; Mechanical14 "G" at 403.232,161.457 h1 r90; Mechanical14 "F" at 404.632,161.457 h1 r90; Mechanical14 "E" at 406.032,161.457 h1 r90; Mechanical14 "D" at 407.432,161.457 h1 r90; Mechanical14 "C" at 408.832,160.457 h1 r90; Mechanical14 "B" at 410.232,160.457 h1 r90; Mechanical14 "A" at 411.632,160.457 h1 r90; Mechanical8 "Edge of Daugher Card" at 413.982,165.432 h0.5 r90; Mechanical8 "Top Surface of Mother Board" at 425.482,164.282 h0.5 r90
J5: TopOverlay "7" at 391.181,252.308 h1 r90; TopOverlay "8" at 391.181,254.308 h1 r90; TopOverlay "6" at 391.181,250.308 h1 r90; TopOverlay "5" at 391.181,248.308 h1 r90; TopOverlay "4" at 391.181,246.308 h1 r90; TopOverlay "3" at 391.181,244.308 h1 r90; TopOverlay "2" at 391.181,242.308 h1 r90; TopOverlay "1" at 391.181,240.308 h1 r90; TopOverlay "L" at 396.231,238.458 h1 r90; TopOverlay "K" at 397.631,238.458 h1 r90; TopOverlay "J" at 399.031,238.458 h1 r90; TopOverlay "I" at 400.431,238.708 h1 r90; TopOverlay "H" at 401.831,238.458 h1 r90; TopOverlay "G" at 403.231,238.458 h1 r90; TopOverlay "F" at 404.631,238.458 h1 r90; TopOverlay "E" at 406.031,238.458 h1 r90; TopOverlay "D" at 407.431,238.458 h1 r90; TopOverlay "C" at 408.831,237.458 h1 r90; TopOverlay "B" at 410.231,237.458 h1 r90; TopOverlay "A" at 411.631,237.458 h1 r90; DrillDrawing "Diam. 0.5mm +/-0.05" at 395.442,262.128 h1; DrillDrawing "PRESS-FIT TECHNOLOGY" at 395.181,260.35 h1; Mechanical14 "7" at 391.181,252.308 h1 r90; Mechanical14 "8" at 391.181,254.308 h1 r90; Mechanical14 "6" at 391.181,250.308 h1 r90; Mechanical14 "5" at 391.181,248.308 h1 r90; Mechanical14 "4" at 391.181,246.308 h1 r90; Mechanical14 "3" at 391.181,244.308 h1 r90; Mechanical14 "2" at 391.181,242.308 h1 r90; Mechanical14 "1" at 391.181,240.308 h1 r90; Mechanical14 "L" at 396.231,238.458 h1 r90; Mechanical14 "K" at 397.631,238.458 h1 r90; Mechanical14 "J" at 399.031,238.458 h1 r90; Mechanical14 "I" at 400.431,238.708 h1 r90; Mechanical14 "H" at 401.831,238.458 h1 r90; Mechanical14 "G" at 403.231,238.458 h1 r90; Mechanical14 "F" at 404.631,238.458 h1 r90; Mechanical14 "E" at 406.031,238.458 h1 r90; Mechanical14 "D" at 407.431,238.458 h1 r90; Mechanical14 "C" at 408.831,237.458 h1 r90; Mechanical14 "B" at 410.231,237.458 h1 r90; Mechanical14 "A" at 411.631,237.458 h1 r90; Mechanical8 "Edge of Daugher Card" at 413.981,244.433 h0.5 r90; Mechanical8 "Top Surface of Mother Board" at 425.481,243.283 h0.5 r90
J14: TopOverlay "30" at 392.512,186.268 h1.02 r270; Mechanical14 "30" at 392.512,186.268 h1.02 r270
J24: TopOverlay "30" at 373.742,186.267 h1.02 r270; Mechanical14 "30" at 373.742,186.267 h1.02 r270